# EAGLE board Hybrid Driver 1.1 (EAGLE 6.2)
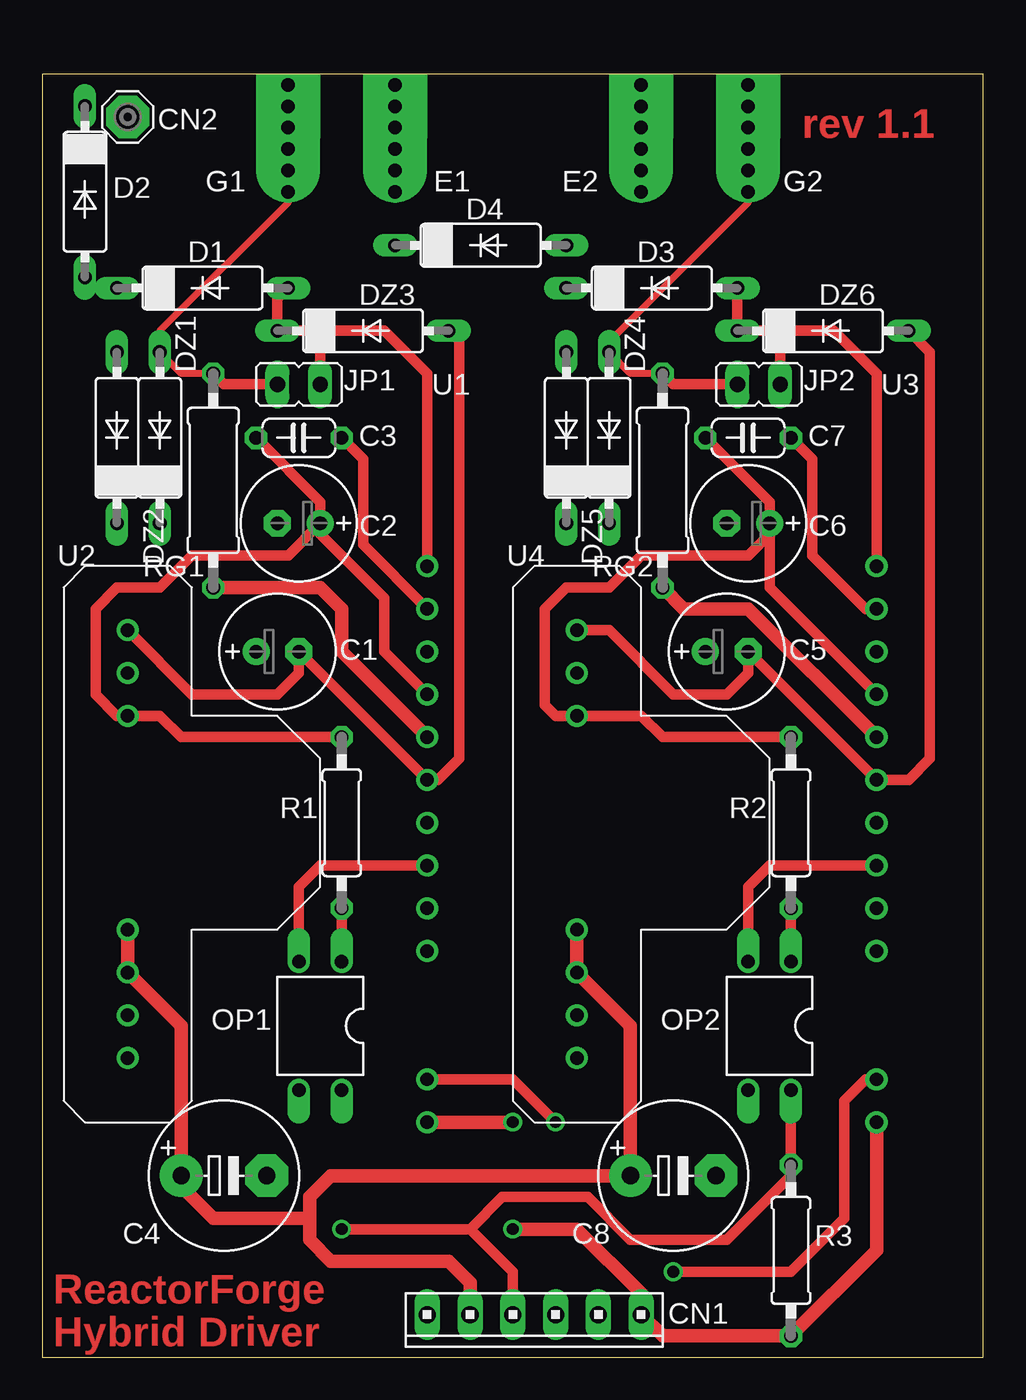
[diagram p0: board, top side]
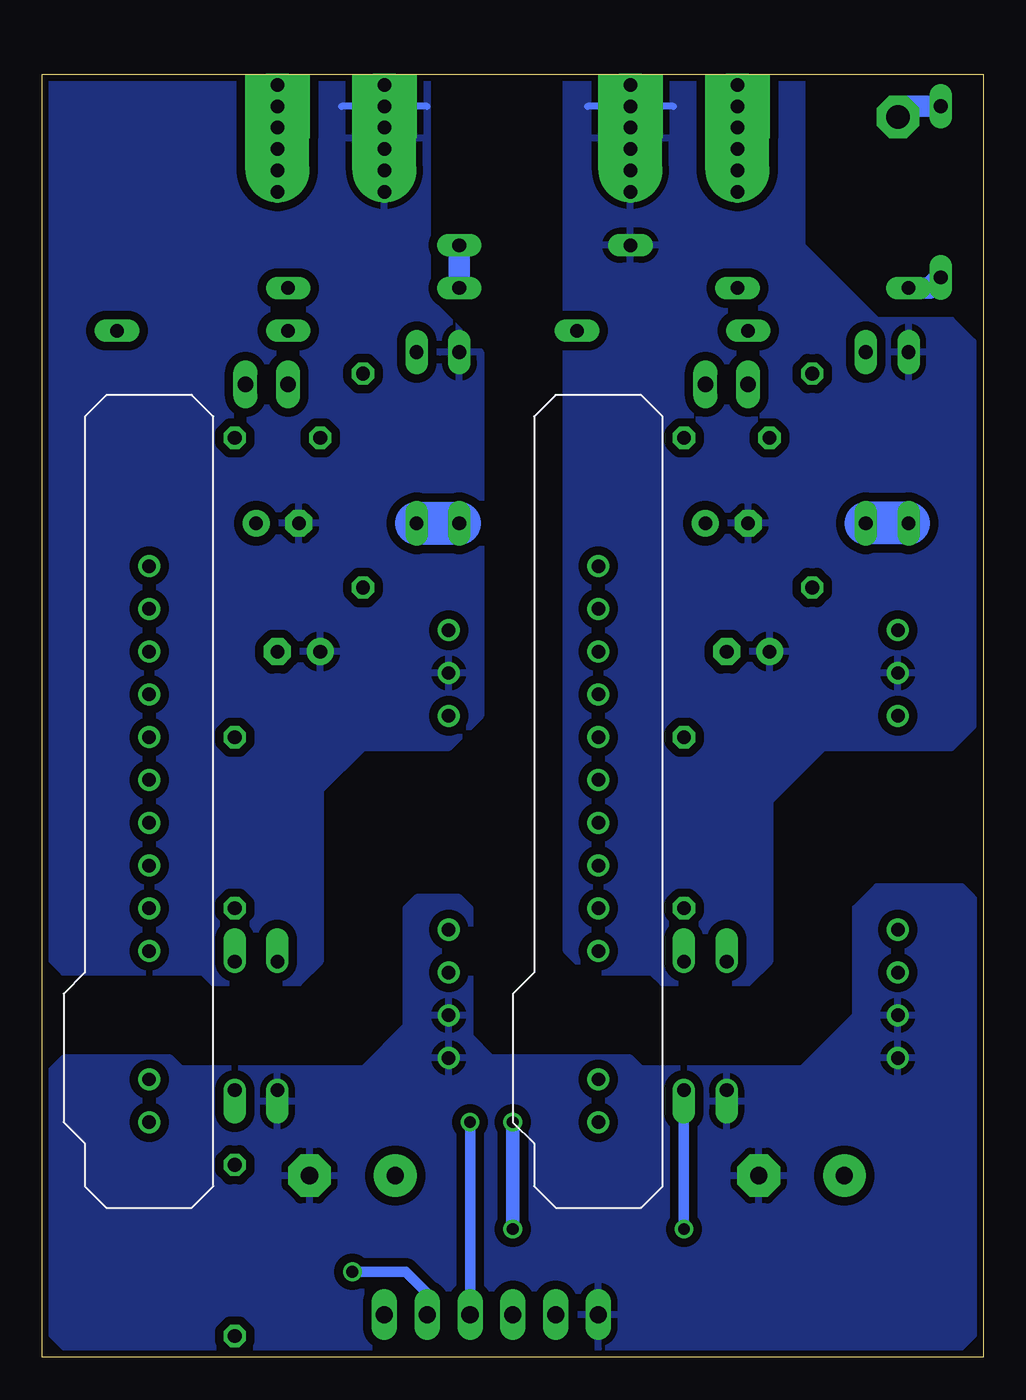
[diagram p1: board, bottom side, seen from below]

Size 55.88 x 76.2 mm. Coordinates in mm from the lower left corner, seen from the top.
Outline: 0,0 55.88,0 55.88,76.2 0,76.2 0,0
Copper layers (1*16): Top 0.035mm / dielectric 1.5mm / Bottom 0.035mm
Design rules: minimum track width 10mil, minimum drill 24mil, track to track 20mil, track to pad 20mil, pad to pad 20mil, via to via 20mil, smd to smd 8mil, copper to edge 15mil, drill to drill 8mil, minimum pad ring 10mil, minimum via ring 8mil, stop-mask expansion 4mil, vias tented up to drill 0mil, thermal gap 15mil
Net classes: 0 default: width 0.406 mm; 1 power: width 0.508 mm

## Footprints (pad centres in the part's own frame; a part is rotated, then mirrored left to right if it is on the bottom)
E2,5-7 = drill 0.813 pad 1.6: + -1.27,0 | drill 0.813 pad 1.6 octagon: - 1.27,0
C050-024X044 = drill 0.813 octagon: 1 -2.54,0; 2 2.54,0
E5-8,5 = drill 1.016 pad 2.54: + -2.54,0 | drill 1.016 pad 2.54 octagon: - 2.54,0
10X06MTA = drill 1.016 long: 1 6.35,0; 2 3.81,0; 3 1.27,0; 4 -1.27,0; 5 -3.81,0; 6 -6.35,0
SE14 = drill 1.397 pad 2.54 octagon: MP 0,0
DO07 = drill 0.813 long: A 5.08,0; C -5.08,0
DIODE.4-AXIAL = drill 0.813 long: A 5.08,0; C -5.08,0
IGBT-PAD = drill 0.8 pad 1.27: 1 0,-1.27 | drill 0.8 pad 3.81 offset: 2 0,0 | drill 0.8 pad 1.27 square: 3 0,1.27; 4 0,2.54; 6 0,5.08 | drill 0.8 pad 3.81 square: 5 0,3.81
JP1 = drill 0.914 long: 1 0,-1.27; 2 0,1.27
DIL04 = drill 0.813 offset: 1 -1.27,-3.81; 2 1.27,-3.81; 3 1.27,3.81; 4 -1.27,3.81
0207/10 = drill 0.813 octagon: 1 -5.08,0; 2 5.08,0
0309/12 = drill 0.813 octagon: 1 -6.35,0; 2 6.35,0
HYBRID-IC-IBGT-GATE-DRIVER = drill 0.8: 1 10.16,3.81; 2 12.7,3.81; 3 15.24,3.81; 4 17.78,3.81; 5 20.32,3.81; 6 22.86,3.81; 7 25.4,3.81; 8 27.94,3.81; 9 30.48,3.81; 10 33.02,3.81; 13 40.64,3.81; 14 43.18,3.81
ISOLATED_DC_DC_CONVERTER = drill 0.8: 1 3.81,3.81; 2 6.35,3.81; 3 8.89,3.81; 8 21.59,3.81; 9 24.13,3.81; 10 26.67,3.81; 11 29.21,3.81

## Placement (x,y rotation side)
C1  82uF  [E2,5-7]  13.97,41.91 0 top
C2  82uF  [E2,5-7]  15.24,49.53 180 top
C3  0-200pF  [C050-024X044]  15.24,54.61 180 top
C4  150uF  [E5-8,5]  10.79,10.79 0 top
C5  82uF  [E2,5-7]  40.64,41.91 0 top
C6  82uF  [E2,5-7]  41.91,49.53 180 top
C7  0-200pF  [C050-024X044]  41.91,54.61 180 top
C8  150uF  [E5-8,5]  37.47,10.79 0 top
CN1  MTA100-6  [10X06MTA]  29.21,2.54 180 top
CN2  SE14  [SE14]  5.08,73.66 0 top
D1  MUR1100E  [DO07]  9.53,63.5 0 top
D2  MUR1100E  [DO07]  2.54,69.22 270 top
D3  MUR1100E  [DO07]  36.2,63.5 0 top
D4  MUR1100E  [DO07]  26.04,66.04 0 top
DZ1  1N4745  [DIODE.4-AXIAL]  6.99,54.61 90 top
DZ2  1N4745  [DIODE.4-AXIAL]  4.45,54.61 90 top
DZ3  1N4751  [DIODE.4-AXIAL]  19.05,60.96 0 top
DZ4  1N4745  [DIODE.4-AXIAL]  33.66,54.61 90 top
DZ5  1N4745  [DIODE.4-AXIAL]  31.11,54.61 90 top
DZ6  1N4751  [DIODE.4-AXIAL]  46.35,60.96 0 top
E1  IGBT-PAD  [IGBT-PAD]  20.95,70.48 0 top
E2  IGBT-PAD  [IGBT-PAD]  35.56,70.48 0 top
G1  IGBT-PAD  [IGBT-PAD]  14.61,70.48 0 top
G2  IGBT-PAD  [IGBT-PAD]  41.91,70.48 0 top
JP1  [JP1]  15.24,57.78 90 top
JP2  [JP1]  42.55,57.78 90 top
OP1  PS2501  [DIL04]  16.51,19.68 180 top
OP2  PS2501  [DIL04]  43.18,19.68 180 top
R1  4.7K  [0207/10]  17.78,31.75 270 top
R2  4.7K  [0207/10]  44.45,31.75 270 top
R3  4.7K  [0207/10]  44.45,6.35 270 top
RG1  [0309/12]  10.16,52.07 90 top
RG2  [0309/12]  36.83,52.07 90 top
U1  M57962L  [HYBRID-IC-IBGT-GATE-DRIVER]  19.05,57.15 270 top
U2  VLA106-15242  [ISOLATED_DC_DC_CONVERTER]  1.27,46.99 270 top
U3  M57962L  [HYBRID-IC-IBGT-GATE-DRIVER]  45.72,57.15 270 top
U4  VLA106-15242  [ISOLATED_DC_DC_CONVERTER]  27.94,46.99 270 top

## Library data of the parts
C1-C8 R1-R3 RG1 RG2 = resistor
CN1 = con-amp
CN2 = solpad
D1-D4 = diode
DZ1-DZ6 E1 E2 G1 G2 U1-U4 = 1-Custom
JP1 JP2 = jumper
OP1 OP2 = optocoupler; MPN: PC817X4J000F; OC_FARNELL: 9707727; OC_NEWARK: 97K7059

## Nets
G1: DZ1.A G1.1 G1.2 G1.3 G1.4 G1.5 G1.6 JP1.2 RG1.2
G2: DZ4.A G2.1 G2.2 G2.3 G2.4 G2.5 G2.6 JP2.2 RG2.2
GND: C4.- C8.- CN1.1 OP1.3 OP2.3 U2.10 U2.11 U4.10 U4.11
GND-E1: C1.+ C2.- D4.C DZ2.A E1.1 E1.2 E1.3 E1.4 E1.5 E1.6 U2.2
GND-E2: C5.+ C6.- DZ5.A E2.1 E2.2 E2.3 E2.4 E2.5 E2.6 U4.2
N$1: C3.1 U1.2
N$2: D1.C D2.A
N$3: CN2.MP D2.C
N$4: D1.A DZ3.C JP1.1 U1.1
N$6: OP2.1 R2.2
N$7: DZ1.C DZ2.C
N$8: DZ4.C DZ5.C
N$9: CN1.6 R3.2 U1.14 U3.14
N$10: OP2.2 U3.8
N$11: OP1.2 U1.8
N$12: OP1.1 R1.2
N$13: CN1.3 OP1.4 OP2.4 R3.1
N$14 [power]: C5.- DZ6.A U3.6 U4.1
N$15 [power]: C1.- DZ3.A U1.6 U2.1
N$16: C2.+ C3.2 R1.1 U1.4 U2.3
N$18: RG2.1 U3.5
N$19: C6.+ C7.2 R2.1 U3.4 U4.3
N$21: RG1.1 U1.5
N$22: D3.A DZ6.C JP2.1 U3.1
N$25: D3.C D4.A
N$26: C7.1 U3.2
N$30 [power]: C4.+ C8.+ CN1.2 U2.8 U2.9 U4.8 U4.9
N$31: CN1.4 U1.13
N$32: CN1.5 U3.13

## Tracks (layer width: path | path; a pad name or v marks a point on that pad's centre or on a via)
G1
  Top 0.406: RG1.2 8.26,58.42 DZ1.A 6.99,60.96 14.61,68.58 G1.1 G1.2 G1.3 G1.4 G1.5 G1.6
  Top 0.61: JP1.2 10.79,57.78 RG1.2
G2
  Top 0.406: G2.6 G2.5 G2.4 G2.3 G2.2 G2.1 41.91,68.58 33.66,60.33 DZ4.A 34.92,58.42 RG2.2
  Top 0.61: JP2.2 37.47,57.78 RG2.2
GND
  pour Bottom: 48.26,17.78 54.61,17.78 55.88,16.51 55.88,1.91 53.98,0 1.91,0 0,1.91 0,26.67 1.27,27.94 6.35,27.94 7.62,26.67 7.62,20.32 10.79,17.14 20.32,17.14 20.95,17.78 29.21,17.78 30.48,19.05 30.48,26.67 31.11,27.3 33.66,27.3 34.29,26.67 34.29,19.68 36.83,17.14 47.62,17.14
GND-E1
  Bottom 0.406: 18.41,74.3 23.5,74.3
  pour Bottom: 24.77,24.13 24.77,76.2 10.79,76.2 10.79,66.04 6.35,61.59 1.91,61.59 0.64,60.33 0.64,37.47 1.91,36.2 9.53,36.2 12.7,33.02 12.7,23.5 13.97,22.23 19.05,22.23 19.68,22.86 23.5,22.86
GND-E2
  Bottom 0.406: 33.02,74.3 38.1,74.3
  pour Bottom: 55.88,76.2 33.02,76.2 33.02,62.87 29.84,59.69 29.84,38.1 31.75,36.2 36.83,36.2 39.37,33.66 39.37,23.5 40.64,22.23 45.72,22.23 46.35,22.86 54.61,22.86 55.88,24.13
N$1
  Top 0.61: U1.2 19.05,48.26 19.05,53.34 C3.1
N$2
  Bottom 1.27: D1.C 3.17,63.5 D2.A
N$3
  Bottom 1.27: D2.C 4.45,74.3 CN2.MP
N$4
  Top 0.61: U1.1 22.86,58.42 20.32,60.96 16.51,60.96 | 16.51,60.96 DZ3.C 13.97,62.87 D1.A | JP1.1 16.51,60.96
N$6
  Top 0.61: R2.2 OP2.1
N$7
  Bottom 2.54: DZ2.C DZ1.C
N$8
  Bottom 2.54: DZ4.C DZ5.C
N$9  (via drill 0.7)
  Top 0.813: U3.14 49.53,6.35 R3.2 36.83,1.27 CN1.6 35.56,3.81 31.75,7.62 v27.94,7.62 | U1.14 v27.94,13.97
  Bottom 0.813: v27.94,13.97 v27.94,7.62
N$10
  Top 0.61: OP2.2 41.91,27.94 43.18,29.21 U3.8
N$11
  Top 0.61: U1.8 16.51,29.21 15.24,27.94 OP1.2
N$12
  Top 0.61: R1.2 OP1.1
N$13  (via drill 0.7)
  Top 0.406: R3.1 44.45,10.79
  Top 0.61: OP2.4 R3.1 | 44.45,10.79 40.64,6.99 34.92,6.99 32.38,9.53 27.3,9.53 25.4,7.62 | 25.4,7.62 27.94,5.08 CN1.3 | 25.4,7.62 v17.78,7.62
  Bottom 0.61: OP1.4 v17.78,7.62
N$14
  Top 0.61: U4.1 33.66,43.18 37.47,39.37 40.64,39.37 41.91,40.64 C5.- U3.6 51.44,34.29 52.7,35.56 52.7,59.69 DZ6.A
N$15
  Top 0.508: DZ3.A 24.77,60.33
  Top 0.61: U2.1 8.89,39.37 13.97,39.37 15.24,40.64 C1.- U1.6 23.5,34.29 24.77,35.56 24.77,60.33
N$16
  Top 0.61: R1.1 8.26,36.83 6.99,38.1 U2.3 4.45,38.1 3.17,39.37 3.17,44.45 4.45,45.72 6.99,45.72 8.89,47.62 14.61,47.62 C2.+ | U1.4 20.32,41.91 20.32,45.09 16.51,48.9 C2.+ | C3.2 16.51,50.8 C2.+
N$18
  Top 0.813: U3.5 41.91,44.45 38.1,44.45 RG2.1
N$19
  Top 0.406: C6.+ 43.18,48.9
  Top 0.61: R2.1 36.83,36.83 35.56,38.1 U4.3 30.48,38.1 29.84,38.73 29.84,44.45 31.11,45.72 33.66,45.72 35.56,47.62 41.91,47.62 43.18,48.9 | U3.4 43.18,45.72 C6.+ 43.18,50.8 C7.2
N$21
  Top 0.813: U1.5 17.78,41.91 17.78,44.45 16.51,45.72 RG1.1
N$22
  Top 0.61: U3.1 49.53,58.42 46.99,60.96 43.81,60.96 | 43.81,60.96 DZ6.C D3.A | JP2.1 43.81,60.96
N$25
  Bottom 1.27: D3.C D4.A
N$26
  Top 0.61: U3.2 48.9,44.45 45.72,47.62 45.72,53.34 C7.1
N$30
  Top 0.508: C4.+ 8.26,10.16
  Top 0.813: 15.88,8.26 15.88,9.53 17.14,10.79 C8.+ 34.92,19.68 U4.9 U4.8 | 15.88,8.26 15.88,6.99 17.14,5.71 24.13,5.71 25.4,4.45 CN1.2 | 8.26,10.16 10.16,8.26 15.88,8.26 | U2.8 U2.9 8.26,19.68 C4.+
N$31  (via drill 0.7)
  Top 0.61: U1.13 27.94,16.51 v30.48,13.97
  Bottom 0.61: CN1.4 v30.48,13.97
N$32  (via drill 0.7)
  Top 0.61: U3.13 48.9,16.51 47.62,15.24 47.62,8.26 44.45,5.08 v37.47,5.08
  Bottom 0.61: CN1.5 33.02,3.81 34.29,5.08 v37.47,5.08

## Text on the board
Top: rev 1.1 | ReactorForge | Hybrid Driver